# Altium PCB PCB_Worm_robot_pneumatic_board_v1.PcbDoc
Units mm, origin at the board's own origin, x right, y up, seen from the top; angles counter-clockwise.
Board outline 23.88 x 70.61 mm, 2 copper layers (Top Layer, Bottom Layer); 17 components, 14 nets, 53 pads, 7 vias.
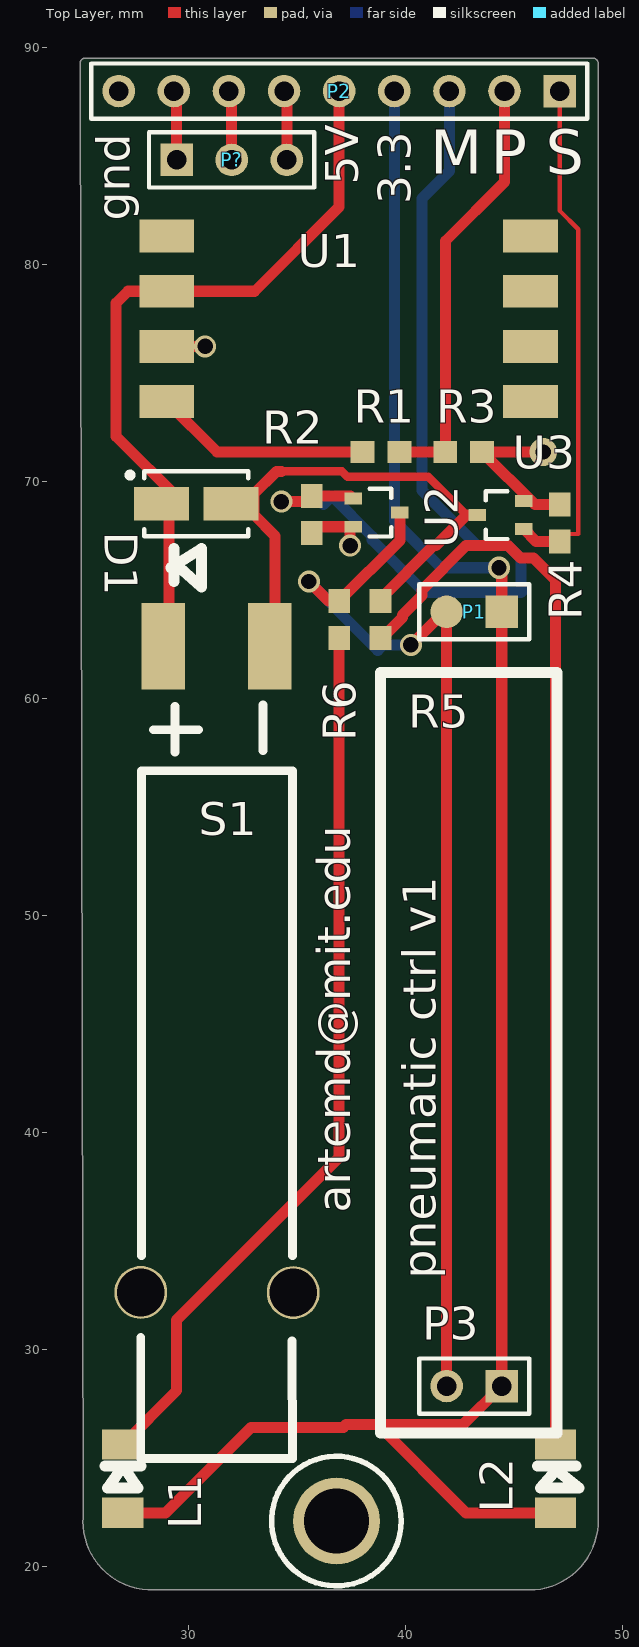
[diagram p0: Top Layer view]
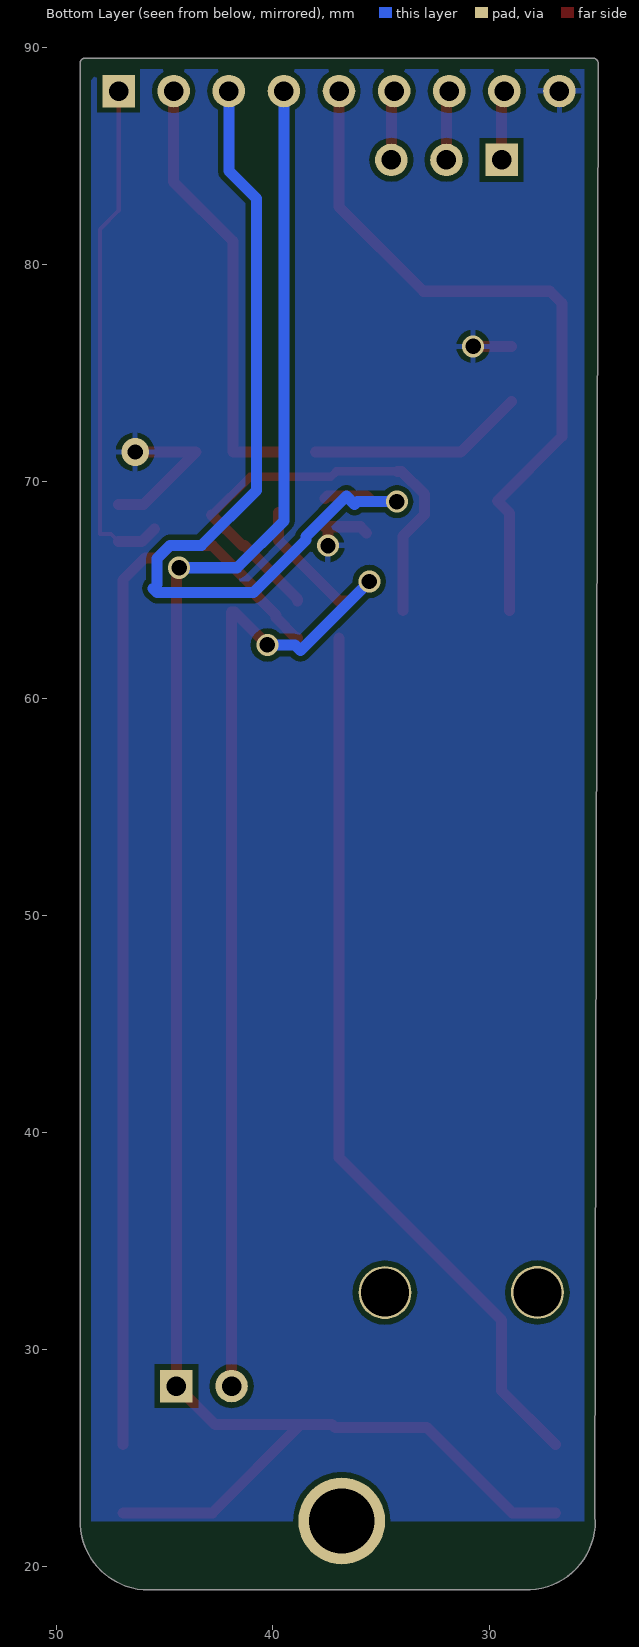
[diagram p1: Bottom Layer view, seen from below]
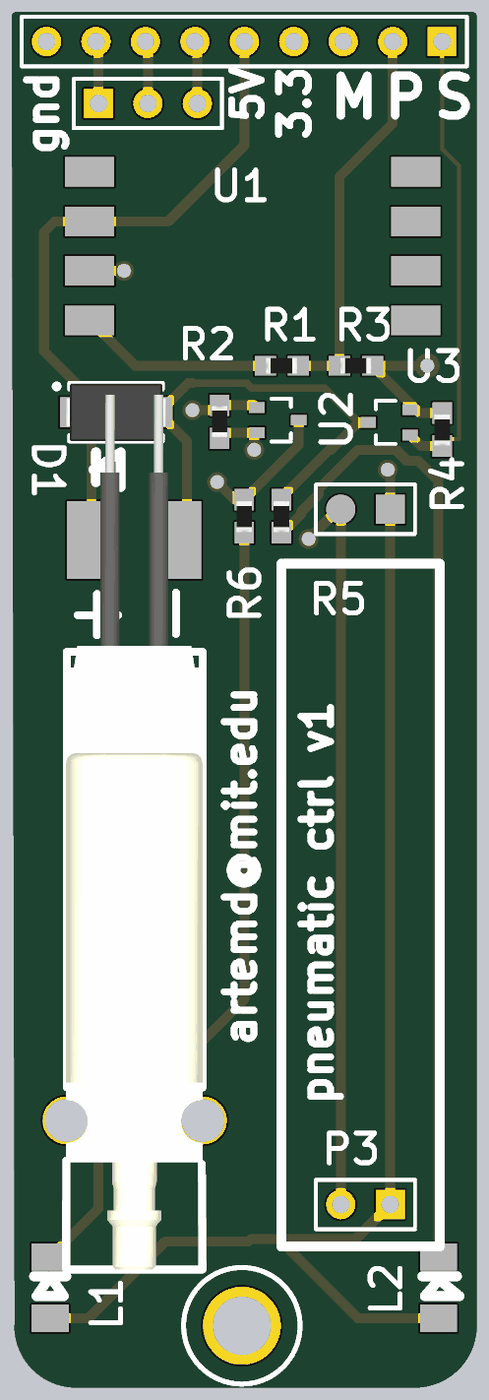
[diagram p2: 3D render of the assembled board from above, using the file's embedded part models]

## Layer stack, top to bottom
Top Solder: solder mask 0.0102, Solder Resist, Dk 3.5
Top Layer: signal copper 0.0356
Dielectric 1: dielectric 0.32, FR-4, Dk 4.8
Bottom Layer: signal copper 0.0356
Bottom Solder: solder mask 0.0102, Solder Resist, Dk 3.5

## Board outline
25.146,22.098 cw(c25.4,22.098) 25.159,22.18 25.011,89.28 cw(c25.265,89.281) 25.265,89.535 48.641,89.535 cw(c48.641,89.281) 48.895,89.281 48.895,21.971 cw(c48.641,21.971) 48.89,21.921 cw(c45.72,22.098) 45.72,18.923 28.194,18.923 cw(c28.194,19.177) 28.144,18.928 cw(c28.321,22.098)

## Design rules (kind name [scope] priority, off if disabled: settings)
Clearance [All] p1: gap=0.254 ignorepadtopadclearanceinfootprint=FALSE except(0: Arc-Hole Track-Hole SMDPad-Hole THPad-Hole Via-Hole Fill-Hole Poly-Hole Region-Hole Text-Hole)
PolygonConnect [All] p1: connectstyle=Relief reliefconductorwidth=0.254 reliefentries=4 polygonreliefangle="90 Angle" airgapwidth=0.254
RoutingVias [All] p1: holewidth=0.711 width=1.27 viastyle="Through Hole" minholewidth=0.711 minwidth=1.27 maxholewidth=0.711 maxwidth=1.27
SolderMaskExpansion [All] p1: expansion=0.102
Width [All] p1: maxlimit=0.762 minlimit=0.152 preferedwidth=0.254
30 further rules are at their usual default settings.

## Components (designator, comment, footprint, x,y, rotation, side; value= is the part's Value field where it differs from the comment)
D1 "S1A-S1M" "JEDEC DO-214" 30.353,68.961 r0 top
L1 "LED" RES_1206_SMD 26.035,24.003 r90 top
L2 "LED" RES_1206_SMD 45.974,24.003 r90 top
P1 "Header 2" HDR1X2#1 44.45,64.008 r180 top
P2 "Header 9" HDR1X9 47.117,88.011 r180 top
P3 "Header 2" HDR1X2#2 44.45,28.321 r180 top
P? "Header 3" HDR1X3 29.464,84.836 r0 top
R1 "10K" 0603W 38.862,71.374 r0 top
R2 "10K" 0603W 35.687,68.517 r270 top
R3 "10K" 0603W 42.672,71.374 r0 top
R4 "10K" 0603W 47.117,68.072 r90 top
R5 "330" 0603W 38.862,63.627 r90 top
R6 "330" 0603W 36.957,63.627 r90 top
S1 "SOLENOID VALVE" S070C-5CG-32 38.948,46.439 r90 top
U1 "MPXV6115V" MPXV6115V 37.719,77.724 r180 top
U2 "MOSFET N CHANNEL" SOT323 38.676,68.58 r0 top
U3 "MOSFET N CHANNEL" SOT323 44.391,68.468 r180 top

## Footprints (in the part's own frame and the unit in brackets; to place one, negate y for a bottom-side part, rotate by r counter-clockwise, add the part's x,y. Pads: shape width x height; smd on the part's side, far side on the other; paste and mask are expansions set on the pad)
0603W [mm]
  rect 1.1x1 smd: 1(-0.825,0) 2(0.875,0)
  body extent -0.8,-0.4 0.8,0.4, height 0.45
HDR1X2#1 [mm] "Connector; Header; 2 Position"
  rect 1.5x1.5 smd: 1(0,0)
  round 1.5 smd: 2(2.54,0)
  silkscreen extent -1.27,-1.27 3.81,1.27
HDR1X2#2 [mm] "Connector; Header; 2 Position"
  rect 1.5x1.5 hole 0.9: 1(0,0)
  round 1.5 hole 0.9: 2(2.54,0)
  silkscreen extent -1.27,-1.27 3.81,1.27
HDR1X3 [mm] "Connector; Header; 3 Position"
  rect 1.5x1.5 hole 0.9: 1(0,0)
  round 1.5 hole 0.9: 2(2.54,0) 3(5.08,0)
  silkscreen extent -1.27,-1.27 6.35,1.27
HDR1X9 [mm] "Connector; Header; 9 Position"
  rect 1.5x1.5 hole 0.9: 1(0,0)
  round 1.5 hole 0.9: 2(2.54,0) 3(5.08,0) 4(7.62,0) 5(10.16,0) 6(12.7,0) 7(15.24,0) 8(17.78,0) 9(20.32,0)
  silkscreen extent -1.27,-1.27 21.59,1.27
"JEDEC DO-214" [mm] "Diode 2 pin"
  rect 2.55x1.55 smd: 1(-1.585,0.025) 2(1.615,0.025)
  silkscreen extent -3.16,-1.47 2.41,1.53, body extent -2.58,-1.45 2.61,1.5, height 2.2
MPXV6115V [mm] "Vacuum pressure sensor -115kPA"
  rect 2.53x1.52 smd: 1(8.712,-3.6) 2(8.712,-1.06) 3(8.712,1.48) 4(8.712,4.02) 5(-8.048,4.02) 6(-8.048,1.48) 7(-8.048,-1.06) 8(-8.048,-3.6)
  body extent -8.87,-5.46 9.33,5.84, height 13
RES_1206_SMD [mm]
  rect 1.4x1.9 smd: 1(-1.525,-0.95) 2(1.625,-0.95)
  body extent -1.55,-1.9 1.8,0, height 0.5
S070C-5CG-32 [mm] "5V Solenoid Valve"
  rect 4x2 smd: 1(15.982,10.098) 2(15.982,5.199)
  round 2.438 hole 2.2: 3(-13.8,11.135) 4(-13.807,4.11)
  silkscreen extent -21.45,4.14 13.28,11.14, body extent -21.45,4.14 23.45,11.14, height 11.5
SOT323 [mm] "Smaller package for SOT23"
  rect 0.8x0.55 smd: 1(-1.075,0.65) 2(-1.075,-0.65) 3(1.075,0)
  silkscreen extent -0.32,-1.1 0.67,1.1, body extent -0.67,-1.1 0.67,1.1, height 1.1

## Part data
D1: "General purpose diode 50V 1A SMA", Supplier Part Number 1=ES1AFSCT-ND, Supplier 1=Digikey
L1 L2: "LED SMD 1206/0603"
P1 P3: "Header, 2-Pin", LatestRevisionDate=17-Jul-2002, LatestRevisionNote="Re-released for DXP Platform.", Publisher="Altium Limited"
P2: "Header, 9-Pin", LatestRevisionDate=17-Jul-2002, LatestRevisionNote="Re-released for DXP Platform.", Publisher="Altium Limited"
P?: "Header, 3-Pin", LatestRevisionDate=17-Jul-2002, LatestRevisionNote="Re-released for DXP Platform.", Publisher="Altium Limited"
R1 R2 R3 R4 R5 R6: library part Resistor, Supplier Part Number 1=311-10KJRCT-ND, Supplier 1=Digikey
U1: "Vacuum pressure sensor -115kPa", Supplier Part Number 1=MPXV6115VC6U-ND, Supplier 1=Digikey
U2 U3: digikey part number=1727-4793-1-ND

## Free pads (board coordinates)
  round 4 hole 3: 11(36.83,22.098)

## Via types
v1: diameter 1.016, hole 0.711, Top Layer to Bottom Layer, tented both sides, 6 vias
v2: diameter 1.27, hole 0.711, Top Layer to Bottom Layer, tented both sides, 1 vias

## Nets (pads, with @x,y where several pads share a name; then routed paths per layer and width w, separated by ;. In a path a pad name is that pad's centre, name@x,y a point inside that pad or via, vN(x,y) a via of type N, cw(c..) or ccw(c..) an arc to the next point about the centre after c; other vN are vias at no path point)
3.3V: L1.1 L2.1 P1.1 P2.4 P3.1 | length 93.1
  Top Layer w0.508: L1.1 28.956,22.478 32.893,26.415 37.145,26.415 37.273,26.543 38.735,26.543 ; v1(44.323,66.04) 44.45,65.913 P1.1 P3.1 42.672,26.543 38.735,26.543 ; L2.1 42.8,22.478 38.735,26.543
  Bottom Layer w0.508: P2.4 39.497,68.199 41.656,66.04 v1(44.323,66.04)
5V: D1.1 P2.5 S1.1 U1.2 | length 33.1
  Top Layer w0.508: S1.1@29.103,64.072 29.103,68.56 29.657,69.113 26.67,72.1 26.67,78.232 27.222,78.784 U1.2 33.064,78.784 36.957,82.677 P2.5
GND: P2.9 R2.2 R3.2 R4.2 U1.3 U2.2 U3.2 | length 12.1
  Top Layer w0.508: U1.3 v1(30.778,76.244) ; R2.2 35.975,67.93 U2.2 37.465,67.794 v1(37.465,67.056) ; v2(46.355,71.374) R3.2 45.974,68.947 R4.2
NetD1_2: D1.2 R5.2 S1.2 U3.3 | length 22.5
  Top Layer w0.381: 34.287,70.485 37.084,70.485 37.338,70.231 41.065,70.231 42.828,68.468
  Top Layer w0.508: S1.2@34.003,64.072 34.003,67.505 33.02,68.488 33.02,69.434 34.071,70.485 34.287,70.485 ; R5.2 38.862,64.608 41.31,67.056 41.416,67.056 42.828,68.468
NetL1_2: L1.2 R6.1 | length 41.3
  Top Layer w0.508: L1.2 29.464,28.107 29.464,31.369 36.957,38.862 R6.1
NetL2_2: L2.2 R5.1 | length 50.5
  Top Layer w0.508: R5.1 38.93,62.802 39.87,63.742 39.87,63.862 40.767,64.759 40.767,65.024 42.799,67.056 44.744,67.056 45.315,66.485 45.91,66.485 46.924,65.471 L2.2
NetP1_2: P1.2 P3.2 R6.2 U2.3 | length 51.1
  Top Layer w0.508: v1(35.56,65.405) 36.463,64.502 R6.2 39.751,67.296 U2.3 ; v1(40.259,62.484) 41.783,64.008 P1.2 P3.2
  Bottom Layer w0.508: v1(35.56,65.405) 38.735,62.23 38.989,62.484 v1(40.259,62.484)
NetP2_6: P2.6 P?.3 | length 3.2
  Top Layer w0.508: P2.6 34.544,87.884 P?.3
NetP2_7: P2.7 P?.2 | length 3.2
  Top Layer w0.508: P2.7 32.004,87.884 P?.2
NetP2_8: P2.8 P?.1 | length 3.2
  Top Layer w0.508: P2.8 29.464,87.884 P?.1
NetR1_1: R1.1 U1.4 | length 10
  Top Layer w0.508: U1.4 31.337,71.374 R1.1
PRESSURE: P2.2 R1.2 R3.1 | length 19.9
  Top Layer w0.508: R1.2 R3.1 41.847,81.09 44.577,83.82 P2.2
PUMP: P2.3 R2.1 U2.1 | length 42.9
  Top Layer w0.508: v1(34.29,69.088) 35.433,69.088 R2.1 37.489,69.342 U2.1
  Bottom Layer w0.508: v1(34.29,69.088) 36.108,69.088 36.235,68.961 36.616,69.342 38.481,67.477 38.481,67.31 40.894,64.897 45.339,64.897 45.533,65.091 ; P2.3 42.037,84.328 40.767,83.058 40.767,69.596 43.307,67.056 44.744,67.056 45.339,66.461 45.339,65.285 45.346,65.278
SOLENOID: P2.1 R4.1 U3.1 | length 23.7
  Top Layer w0.203: R4.1 47.467,67.597 47.973,67.597 47.973,81.646 47.117,82.502 P2.1
  Top Layer w0.508: U3.1 46.037,67.247 R4.1
pads on no net: S1.3 S1.4 U1.1 U1.5 U1.6 U1.7 U1.8

## Polygon pours and split planes (outlines as drawn)
GND on Bottom Layer "GND" (solid, remove dead copper, pour order 0): 25.654,22.098 25.654,89.027 47.879,89.027 48.387,88.519 48.387,22.098

## Silkscreen, mask and mechanical layers (free items; w line width, h text height)
Top Overlay:
  circle w0.254: c36.83,22.098 r2.989
  lines w0.5: 38.862,26.162 38.862,61.214 46.99,61.214 46.99,26.162 38.862,26.162
  lines w0.508: 26.162,24.638 27.813,24.638 26.987,24.638 ; 29.21,66.04 30.607,66.929 30.607,65.151 29.337,66.294 ; 29.337,65.405 29.337,66.929 ; 46.101,24.638 47.879,24.638 ; 46.736,24.638 48.006,23.622 46.228,23.622 47.117,24.638 ; 26.987,24.638 26.289,23.622 27.686,23.622 26.987,24.638
  text "M" at 41.148,84.201 h2.03
  text "P" at 43.942,84.201 h2.03
  text "S" at 46.482,84.201 h2.03
  text "5V" at 37.846,83.693 h1.52 r90
  text "3.3" at 40.259,82.804 h1.52 r90
  text "gnd" at 27.305,82.042 h1.52 r90
  text "artemd@mit.edu" at 37.465,36.322 h1.52 r90
  text "pneumatic ctrl v1" at 41.402,33.274 h1.52 r90
Mechanical 2:
  lines w0.508: 25.4,22.098 ccw(c28.321,22.098) 28.321,19.177 ; 25.414,22.097 25.265,89.281 48.641,89.281 48.641,21.971 ; 28.194,19.177 45.72,19.177 ccw(c45.72,22.098) 48.641,22.098